# Altium PCB dalang-v1.3_20211125.PcbDoc (part 4 of 5)
Units mil, origin at the board's own origin, x right, y up, seen from the top; angles counter-clockwise.
Board outline 4000 x 3999.92 mil, 4 copper layers (Top, gnd, vcc, Bottom), stack 35.4 mil thick; 365 components, 335 nets, 1640 pads, 1414 vias.
Unrouted connection lines stored in the file: 894.
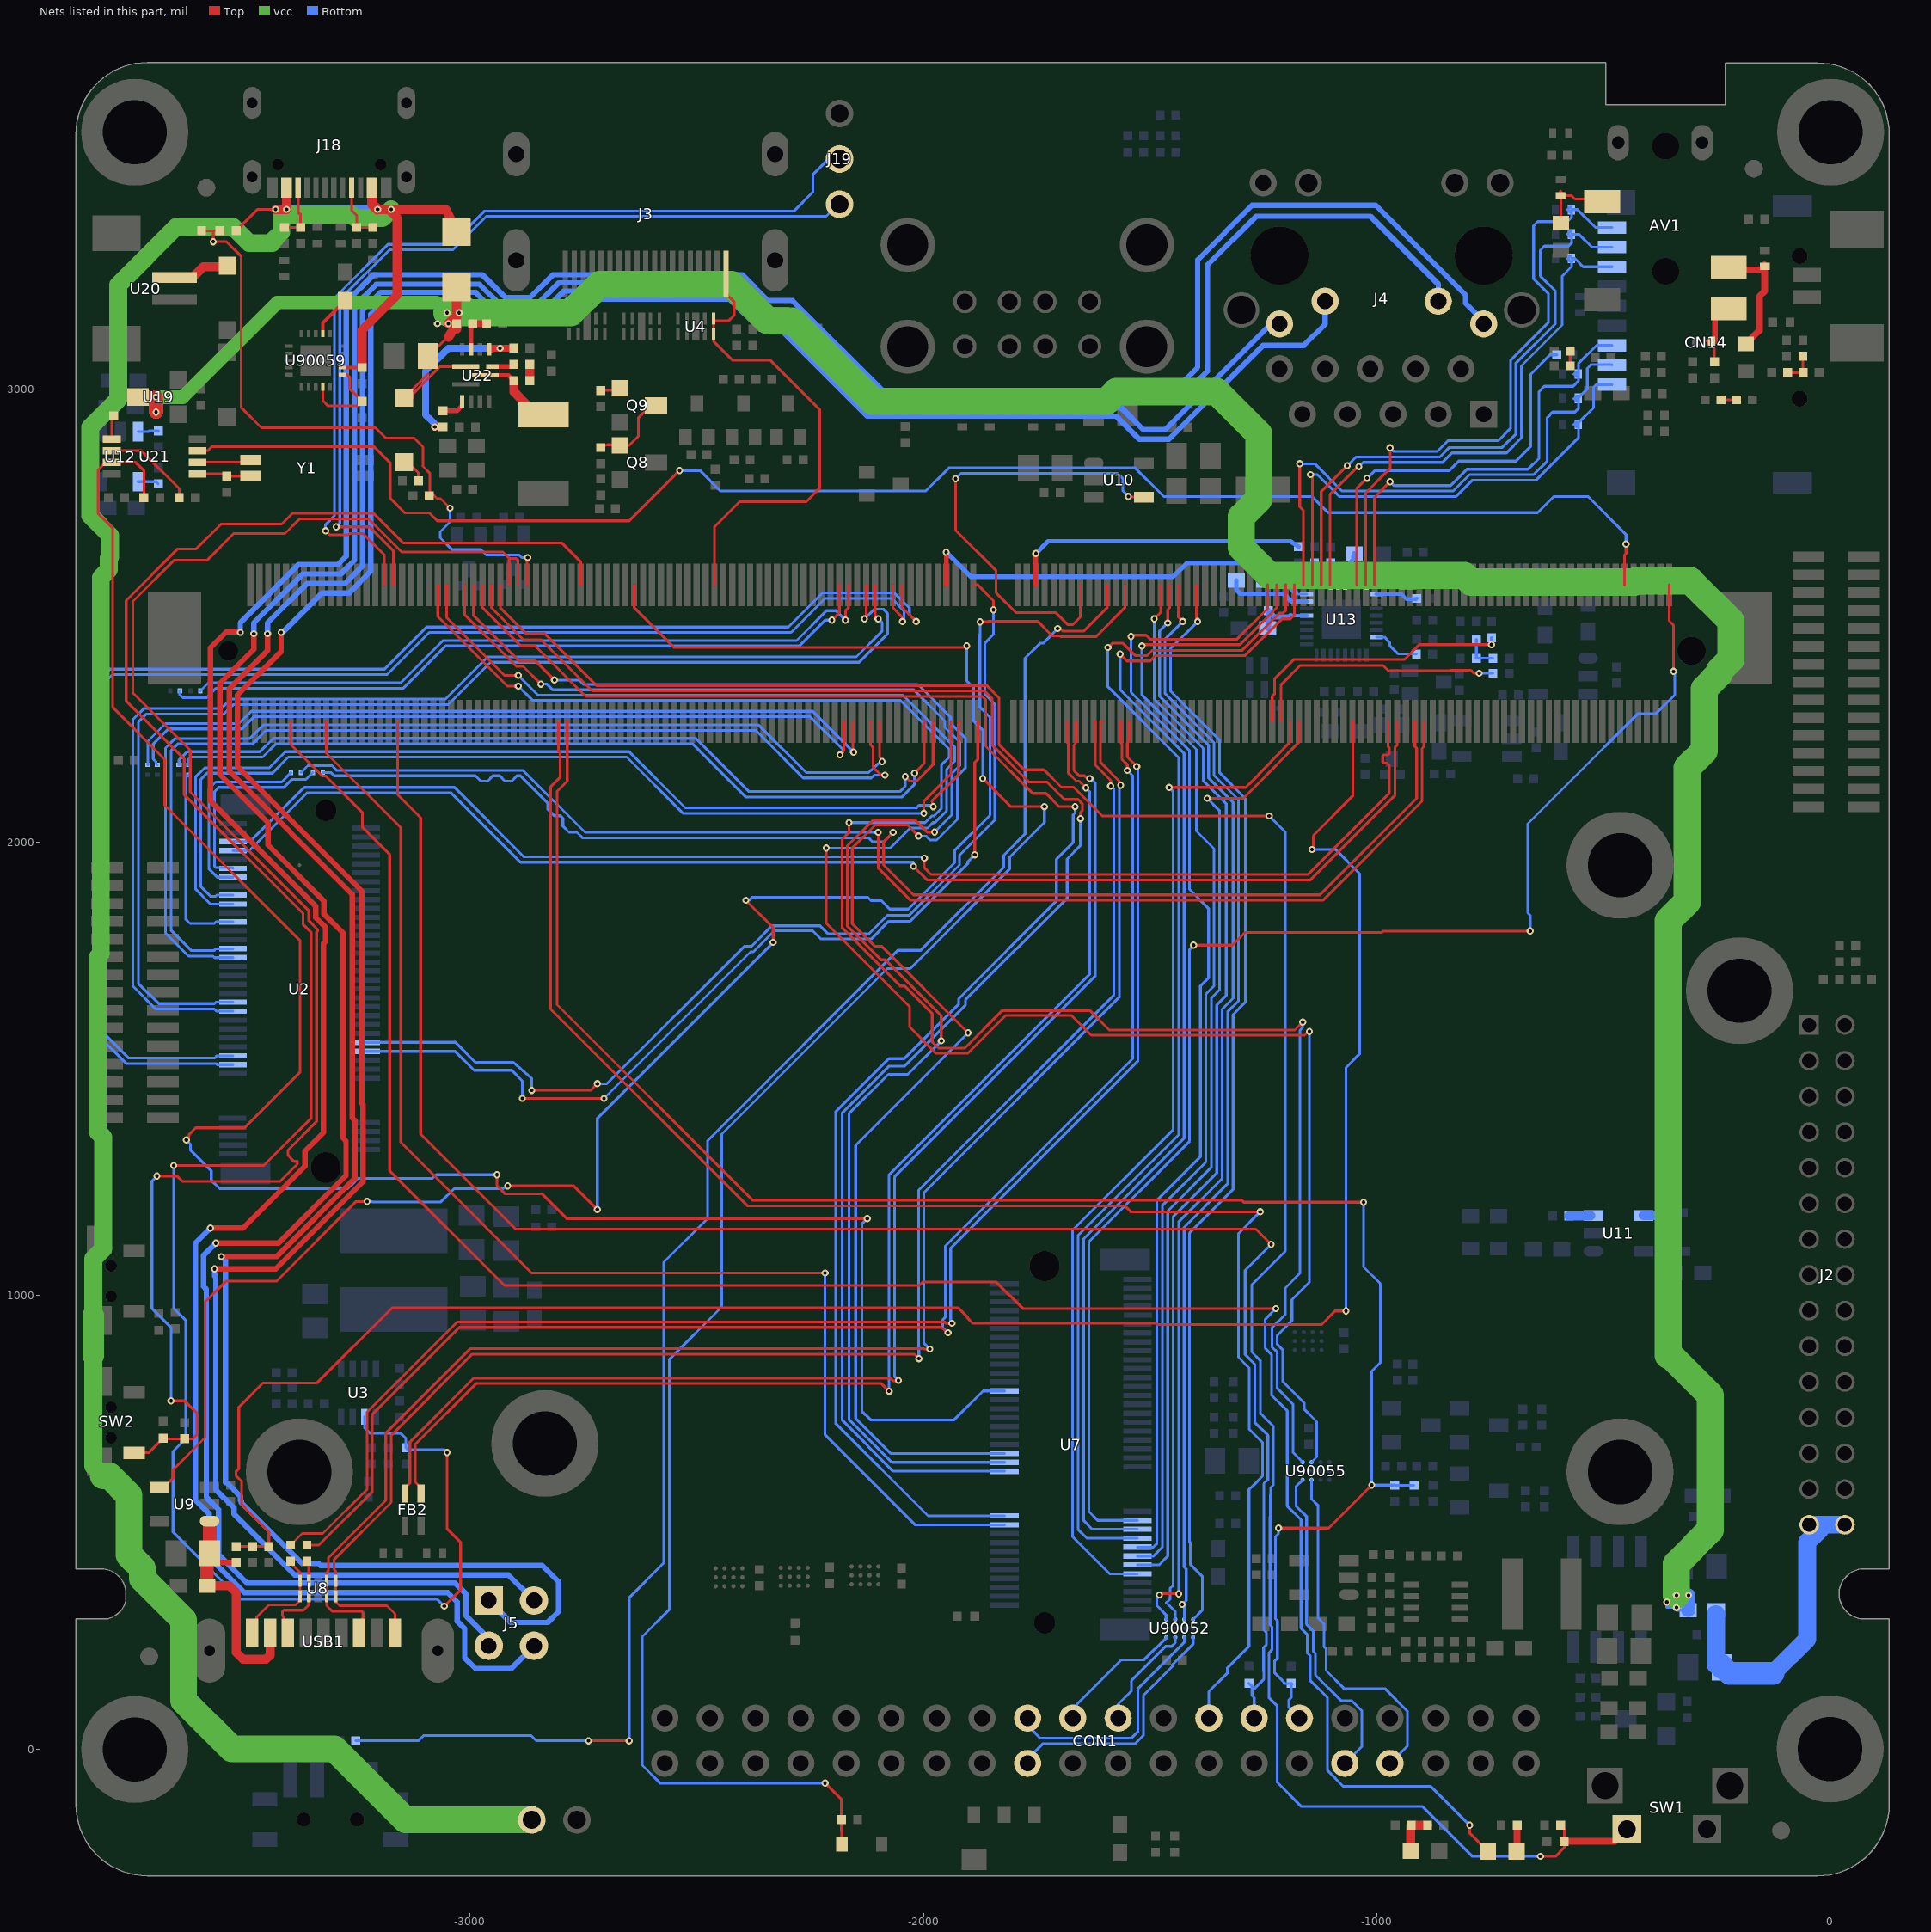
[diagram p5: the nets of this part, all layers, seen from the top]

## Via types
v1: diameter 15.75, hole 7.87, Top to Bottom, 1414 vias

## Nets (pads, with @x,y where several pads share a name; then routed paths per layer and width w, separated by ;. In a path a pad name is that pad's centre, name@x,y a point inside that pad or via, vN(x,y) a via of type N, cw(c..) or ccw(c..) an arc to the next point about the centre after c; other vN are vias at no path point) (continued)
N16561736: C15.2 U2.23 | length 430.8
  Bottom w6: C15.2@-3621,2149.17 -3627,2143.17 -3627,1830 -3618,1821 -3564.41,1821 -3561,1824.41 U2.23@-3523.03,1824.41
N16561860: C14.2 U2.13 | length 433.6
  Bottom w6: U2.13@-3523.03,1922.83 -3557.83,1922.83 -3576,1941 -3576,2118 -3561,2133 -3415.83,2133 C14.2@-3394.83,2154
N16561864: C13.2 U2.11 | length 442.4
  Bottom w6: U2.11@-3523.03,1942.52 -3524.55,1944 -3561,1944 -3564,1947 -3564,2112 -3555,2121 -3411,2121 -3393,2139 -3361.83,2139 C13.2@-3346.83,2154
N16594921: C110.1 R105.2 U22.9 | length 412.9
  Top w10: U22.9@-2958.47,3087.09 -2952,3087.09 -2934,3087.09 v1(-2934,3090)
  Top w15: v1(-3078,2916) -3077.72,2916.28 R105.2@-3060,2916.28 ; -2952,3087.09 -2949.09,3090 v1(-2934,3090) C110.1@-2903.72,3090
  Bottom w15: v1(-3078,2916) -3078,2923.02 -3090.28,2935.31 -3091.02,2935.31 -3098.63,2942.91 -3098.63,3039.37 -3048,3090 v1(-2934,3090)
N16595107: C103.2 L3.1 U22.7 | length 185.8
  Top w10: U22.7@-2966.35,3030 -2915.72,3030 C103.2@-2903.72,3018
  Top w20: C103.2@-2903.72,3018 -2903.72,2994 -2874,2964.28 -2874,2952 -2847.39,2952 L3.1@-2838,2942.61
N16595147: R103.1 R104.2 U22.11 | length 88
  Top w10: U22.11@-2997.84,3087.09 -2997.84,3132 R103.1@-2994.28,3144
  Top w15: R103.1@-2994.28,3144 R104.2@-2963.72,3144
N16595155: R101.1 U22.8 | length 48.7
  Top w10: U22.8@-2950.6,3049.68 -2908.03,3049.68 R101.1@-2903.72,3054
N16595159: C103.1 R101.2 | length 36
  Top w20: C103.1@-2868.28,3018 R101.2@-2868.28,3054
N16595281: R105.1 U22.3 | length 56.9
  Top w10: R105.1@-3060,2951.72 -3029.06,2951.72 -3017.53,2963.24 U22.3@-3017.53,2972.91
N16597149: Q8.1 Q9.3 R94.1 | length 184.2
  Top w6: R94.1@-2712,2870.72 -2696.72,2877 -2671.5,2877 Q8.1@-2670,2875.5 -2649,2875.5 -2629,2895.5 -2629,2936 -2601,2964 Q9.3@-2590,2964
N16597580: Q9.1 R96.1 | length 45
  Top w6: R96.1@-2712,2996.72 -2673,2996.72 -2673,2998.5 Q9.1@-2670,3001.5
N16616965: R64.2 U12.3 | length 45.7
  Bottom w5.91: U12.3@-3732.7,2905.61 -3710.11,2905.61 -3708.37,2907.35 R64.2@-3687.75,2907.35
N16617009: C59.1 U12.4 | length 46.8
  Bottom w5.91: U12.4@-3732.7,2795.37 -3693.01,2795.37 C59.1@-3687.99,2790.35
N16618223: R63.2 U11.3 | length 54.6
  Bottom w6: U11.3@-528.37,1176.37 -528,1176.74 U11.3@-522,1176.74
  Bottom w20: R63.2@-576.28,1176 -528.74,1176 U11.3@-528.37,1176.37
N16618267: C58.1 U11.4 | length 54.2
  Bottom w20: U11.4@-411.76,1176.74 -364.98,1176.74 C58.1@-359.72,1182
N16622807: LED1.1 R89.2 | length 58.8
  Top w15: LED1.1@-691.34,-226.38 -690.28,-225.32 R89.2@-690.28,-168
N16650602: R3.2 | length 663.8
  Top w10: -1752.36,2567.72 -1752.36,2636.64 v1(-1752,2637)
  Bottom w10: v1(-1752,2637) -1725,2664 -1189.67,2664 -1187.16,2661.63 R3.2@-1172.72,2652
N16650610: R4.2 | length 784.9
  Top w10: v1(-1950,2640) -1949.21,2639.21 -1949.21,2567.72
  Bottom w5.91: R4.2@-1275.59,2616 R4.2@-1275.59,2619.09
  Bottom w10: v1(-1950,2640) -1896,2586 -1449,2586 -1419,2616 R4.2@-1275.59,2616
N16650818: R2.1 | length 621.5
  Top w6: -1230.71,2266.54 -1230.71,2322 -1225.17,2327.54 -1225.17,2361.29 -1183.46,2403 -938.91,2403 -905.91,2436 v1(-747,2436)
  Bottom w6: v1(-747,2436) R2.1@-747,2451.28
N16650826: R1.1 | length 573.9
  Top w6: -1211.02,2266.54 -1211.02,2348.16 -1169.29,2389.89 -986.2,2389.89 -975.12,2378.81 -836.98,2378.81 -836.11,2379.68 -792.74,2379.68 -786.05,2373 v1(-774,2373)
  Bottom w6: v1(-774,2373) R1.1@-743.72,2373
N16667736: C98.2 U21.1 Y1.1 | length 119.8
  Top w6: U21.1@-3601.52,2812.71 -3543,2812.71 -3538.01,2807.72 C98.2@-3537,2807.72 -3484,2807.72 Y1.1@-3483.83,2807.89
N16667764: U21.2 Y1.2 | length 119.8
  Top w6: U21.2@-3601.52,2838.3 -3488.85,2838.3 Y1.2@-3483.83,2843.32
N16667930: D5.1 U20.2 | length 128
  Top w5.91: D5.1@-3540.35,3269.68 -3538.17,3271.87 D5.1@-3535,3271.87
  Top w20: U20.2@-3652.36,3246.26 -3612,3246.26 -3588.58,3269.68 D5.1@-3540.35,3269.68
N16667996: R99.1 U21.6 | length 203.5
  Top w6: U21.6@-3790.5,2863.89 -3725.72,2863.89 -3641.72,2779.89 R99.1@-3641.72,2760
N16668000: R100.1 U21.5 | length 52.7
  Top w6: U21.5@-3790.5,2889.48 -3790.5,2935.78 R100.1@-3786,2940.28
N16668432: LED2.1 R91.2 R92.2 | length 94
  Top w20: LED2.1@-924.8,-225.2 -924.8,-168.52 R91.2@-924.28,-168 R92.2@-887.72,-168
N16672966: C78.1 R74.2 R75.1 | length 70
  Top w6: R74.2@-93.28,3036 C78.1@-59.72,3036 -59.72,3072 R75.1@-60,3072.28
N16674381: C40.2 R48.2 | length 33.6
  Top w6: R48.2@-240.28,2976 C40.2@-206.72,2976
N16674391: AV1.6 ED5.1 R43.1 | length 156.9
  Top w6: R43.1@-594,3366 ED5.1@-594,3426.28 -588.5,3426.28 -587,3426.28 -569.98,3426.28 -562.7,3419 -508.37,3419 AV1.6@-502.76,3413.39
N16674395: C41.2 R49.2 | length 33
  Top w6: R49.2@-573.28,3051 C41.2@-573.28,3084
N16674471: AV1.3 ED6.1 R45.1 | length 269.9
  Top w5.91: ED6.1@-144,3263 ED6.1@-144,3270.28
  Top w15: AV1.3@-223.23,3267.72 -214.72,3267.72 -210,3263 -144,3263 -144,3216 -156,3204 -156,3129 R45.1@-186,3099
N16674495: AV1.4 ED7.1 R46.1 | length 155.9
  Top w5.91: ED7.1@-261.28,3105 ED7.1@-254,3105
  Top w6: R46.1@-255,3059.72 -255,3104 ED7.1@-254,3105
  Top w12: ED7.1@-254,3105 -254,3177.17 AV1.4@-223.23,3177.17
N16842197: R90549.2 U90059.1 U90059.19 | length 207.9
  Top w5.91: U90059.19@-3324.8,3003.94 -3324.8,2974.41 -3312.99,2962.6 -3248.03,2962.6 R90549.2@-3238.19,2972.44 -3265.75,3000 -3265.75,3025.59 -3271.65,3031.5 U90059.1@-3281.5,3031.5
N16842337: C90286.1 U90059.7 | length 93.2
  Top w7.87: U90059.7@-3324.8,3122.05 -3324.8,3145.67 C90286.1@-3275.59,3194.88
N16842548: J18.A5 R109.1 R90551.2 | length 128
  Top w5.91: J18.A5@-3261.42,3444.09 -3261.42,3393.7 -3250,3382.28 R90551.2@-3250,3356.3 R109.1@-3214.57,3356.3
N16842549: J18.B5 R108.1 R90552.2 | length 125.5
  Top w5.91: R108.1@-3409.45,3356.3 R90552.2@-3374.02,3356.3 -3374.02,3384.25 -3379.53,3389.76 J18.B5@-3379.53,3444.09
N16854878: D3.2 R90557.1 | length 64.6
  Top w5.91: D3.2@-3145.67,2838.58 -3147.64,2840.55 -3139.76,2840.55 -3114.17,2814.96 R90557.1@-3114.17,2797.24
N64903279: C62.1 R69.2 R70.1 | length 78.6
  Bottom w6: R69.2@-780.28,2448 C62.1@-780.28,2406 R70.1@-743.72,2406
N64910867: C66.1 U13.21 | length 73
  Bottom w5.91: -1070.28,2604.72 -1069.88,2604.33 U13.21@-1069.88,2571.85
  Bottom w10: -1070.28,2604.72 -1051.5,2623.5 -1051.5,2628 C66.1@-1050.2,2636.81
N64910878: R65.2 U13.31 | length 108
  Bottom w5.91: U13.31@-1000.98,2452.76 -983.24,2452.76 -971.46,2440.97 -971.46,2434.31 -952.5,2415.35 R65.2@-912.4,2415.35
N64910882: C73.1 C74.1 U13.13 | length 131.3
  Bottom w7.87: -1189.96,2500 U13.13@-1154.53,2500
  Bottom w11.81: C74.1@-1239.28,2511 -1225.27,2496.98 -1192.98,2496.98 -1189.96,2500
  Bottom w12: C73.1@-1240.5,2472 -1239.28,2473.22 C74.1@-1239.28,2511
N64910922: C71.1 U13.15 | length 186.8
  Bottom w9.84: C71.1@-1310.04,2577.76 -1310.04,2557.09 -1301.18,2548.23 -1205.25,2548.23 -1188.52,2531.5 U13.15@-1154.53,2531.5
N64910926: C71.2 U13.16 | length 105.2
  Bottom w5.91: -1179.13,2551.18 -1175.2,2547.24 U13.16@-1154.53,2547.24
  Bottom w11.81: C71.2@-1247.05,2577.76 -1205.71,2577.76 -1179.13,2551.18
N64910964: C64.1 U13.25 | length 94.4
  Bottom w7.87: U13.25@-1000.98,2547.24 -944.88,2547.24 -934.06,2536.42 -913.3,2536.42 C64.1@-911.72,2538
N64911028: C65.1 U13.24 | length 91.9
  Bottom w5.91: U13.24@-1022.64,2571.85 -1012.8,2571.85 ; -950.79,2571.85 -934.44,2571.85 C65.1@-933.6,2572.69
  Bottom w10: C65.1@-933.6,2572.69 C65.1@-931.5,2574
  Bottom w11.81: -1012.8,2571.85 -950.79,2571.85
N166477941: R72.2 U13.19 | length 63.1
  Bottom w5.91: R72.2@-1137.28,2616 -1136.91,2616 -1116.57,2595.66 -1110.05,2595.66 -1101.38,2586.99 U13.19@-1101.38,2571.85
N166482021: R71.2 U13.20 | length 51.4
  Bottom w5.91: R71.2@-1101.38,2616.14 -1100.39,2616.14 -1085.63,2601.38 U13.20@-1085.63,2571.85
NPU_UART2_RX: J19.2 | length 2006.1
  Top w5.91: v1(-3318.9,2687.01) -3310.04,2678.15 -3268.7,2678.15 -3265.75,2681.1 -3236.22,2681.1 -3189.37,2634.25 -3189.37,2567.72
  Bottom w5.91: v1(-3318.9,2687.01) -3318.9,2700.79 -3299.21,2720.47 -3299.21,3200.94 -3181.26,3318.9 -3041.76,3318.9 -2967.95,3392.72 -2285.43,3392.72 -2244.09,3434.06 -2244.09,3472.44 -2209.06,3507.48 J19.2@-2185.04,3507.48
NPU_UART2_TX: J19.1 | length 1921.9
  Top w5.91: v1(-3295.28,2695.87) -3222.18,2695.87 -3169.69,2643.37 -3169.69,2567.72
  Bottom w5.91: v1(-3295.28,2695.87) -3287.4,2703.74 -3287.4,3197.33 -3177.65,3307.09 -3038.15,3307.09 -2964.33,3380.91 -2214.53,3380.91 -2184.79,3410.65 J19.1@-2185.04,3407.48
PCIE_CLKREQNB: U2.52 | length 1945.3
  Top w5.91: v1(-2884.84,1435.04) v1(-2704.72,1435.04)
  Top w6: v1(-1886.81,1972.44) -1886.81,2176.18 -1880.32,2182.68 -1880.32,2266.54
  Bottom w5.91: v1(-2704.72,1435.04) -2381.23,1758.53 -2375.24,1758.53 -2328.97,1804.8 -2244.05,1804.8 -2225.92,1786.68 -2115.5,1786.68 -2076.27,1825.9 -2029.18,1825.9 -1902.01,1953.08 -1902.01,1957.25 v1(-1886.81,1972.44)
  Bottom w6: U2.52@-3229.72,1538.98 -3033.02,1538.98 -2991.09,1497.05 -2908.46,1497.05 -2884.84,1473.43 v1(-2884.84,1435.04)
PCIE_PERST#_3.3V: U2.50 | length 2279.5
  Top w5.91: v1(-2864.17,1452.76) -2734.25,1452.76 v1(-2719.49,1467.52)
  Top w6: -1890.16,2567.72 -1880.27,2567.72 -1845.47,2532.92 v1(-1845.47,2512.8)
  Bottom w6: U2.50@-3229.72,1558.66 -3032.48,1558.66 -2988.58,1514.76 -2905.51,1514.76 -2864.17,1479.33 v1(-2864.17,1452.76) ; v1(-2719.49,1467.52) -2698.17,1467.52 -2395.13,1770.57 -2379.46,1770.57 -2334.27,1815.76 -2228.3,1815.76 -2210.18,1797.63 -2120.53,1797.63 -2078.91,1839.25 -2031.32,1839.25 -1920.5,1950.08 -1920.5,1971.24 -1842.13,2049.61 -1842.13,2304.39 -1864.3,2326.56 -1864.3,2439.91 -1845.47,2458.73 v1(-1845.47,2512.8)
PCIE_PWR: R21.2 U3.6 | length 4940.2
  Top w5.91: v1(-3654,1287) -3455.13,1287 -3404.53,1337.6
  Top w6: -3404.53,1337.6 -3351.09,1391.03 -3351.09,1801.6 -3368.28,1818.79 -3368.28,1842.84 -3630.75,2105.31 -3630.75,2183.9 -3758.86,2312.01 -3758.86,2533.27 -3644.98,2647.15 -3604.44,2647.15 -3549.53,2702.05 -3415.74,2702.05 -3392.3,2725.49 -3212.35,2725.49 -3146.83,2659.97 -2796.97,2659.97 -2756.3,2619.3 -2756.3,2567.72 ; v1(-3057,315) -3021,351 -3021,456 -3051,486 v1(-3051,654)
  Bottom w5.91: U3.6@-3233.2,732.85 -3233.2,708.66 -3221.39,696.85 -3153.54,696.85 -3141.73,685.04 -3141.73,676.18 R21.2@-3141.73,664.64 ; R21.2@-3141.73,664.37 R21.2@-3141.73,664.64 ; -3121.06,659.72 -3136.81,659.72 R21.2@-3141.73,664.64
  Bottom w6: v1(-3654,1287) -3654,972 -3627,945 -3627,685.04 -3655.51,656.53 -3655.51,478.51 -3507,330 -3072,330 v1(-3057,315) ; -3121.06,659.72 -3056.72,659.72 v1(-3051,654)
PCIE_REF_CLKN: U2.53 | length 3049.5
  Top w6: -2067.32,2567.72 -2067.32,2517.15 -2046,2495.83 v1(-2046,2487)
  Bottom w6: U2.53@-3523.03,1529.13 -3558.87,1529.13 -3564,1524 -3753,1524 -3807,1578 -3807,2352 -3789,2370 -3183,2370 -3090,2463 -2292,2463 -2217,2538 -2070,2538 -2043,2511 -2043,2490 v1(-2046,2487)
PCIE_REF_CLKP: U2.55 | length 3119.1
  Top w6: -2047.64,2567.72 -2047.64,2518.64 v1(-2016,2487)
  Bottom w6: U2.55@-3523.03,1509.45 -3558,1509.45 -3560.55,1512 -3759,1512 -3819,1572 -3819,2358 -3795,2382 -3189,2382 -3096,2475 -2298,2475 -2223,2550 -2064,2550 -2031,2517 -2031,2502 v1(-2016,2487)
PCIE_RX0N: U2.41 | length 2723.4
  Top w6: v1(-2130,2493) -2130,2495.38 -2126.38,2499 -2126.38,2567.72
  Bottom w6: U2.41@-3523.03,1647.24 -3561,1647.24 -3564.24,1644 -3687,1644 -3732,1689 -3732,2265 -3714,2283 -3543,2283 -3522,2304 -3048,2304 -2955,2397 -2142,2397 -2079,2460 -2079,2505 -2088,2514 -2109,2514 v1(-2130,2493)
PCIE_RX0P: U2.43 | length 2676.1
  Top w6: -2106.69,2567.72 -2106.69,2496 -2103,2496 v1(-2100,2493)
  Bottom w6: U2.43@-3523.03,1627.56 -3559.56,1627.56 -3564,1632 -3693,1632 -3744,1683 -3744,2271 -3720,2295 -3549,2295 -3528,2316 -3054,2316 -2961,2409 -2148,2409 -2091,2466 -2091,2484 v1(-2100,2493)
PCIE_RX1N: U2.29 | length 2329.5
  Top w6: -2116.54,2266.54 -2116.54,2214.49 -2111.27,2209.22 -2111.27,2166 -2094,2148.73 -2085.73,2148.73 v1(-2085,2148)
  Bottom w6: U2.29@-3523.03,1765.35 -3561,1765.35 -3565.35,1761 -3615,1761 -3660,1806 -3660,2202 -3645,2217 -3480,2217 -3450,2247 -2370,2247 -2265,2142 -2115,2142 -2109,2148 v1(-2085,2148)
PCIE_RX1P: U2.31 | length 2329.6
  Top w6: -2096.85,2266.54 -2096.85,2187 -2091,2181.15 v1(-2091,2178)
  Bottom w6: U2.31@-3523.03,1745.67 -3564,1745.67 -3567.33,1749 -3621,1749 -3672,1800 -3672,2208 -3651,2229 -3486,2229 -3456,2259 -2364,2259 -2259,2154 -2120.45,2154 -2092.49,2179.63 -2091,2181 v1(-2091,2178)
PCIE_RX2N: U2.17 | length 2211.6
  Top w6: v1(-1999.02,2063.98) -1999.02,2090.55 -1939.37,2150.2 -1939.37,2266.54
  Bottom w6: U2.17@-3523.03,1883.46 -3558.54,1883.46 -3561,1881 -3573,1881 -3594,1902 -3594,2139 -3580.44,2152.56 -3436.44,2152.56 -3401.01,2187.99 -2654.53,2187.99 -2530.54,2064 -2025.59,2064 v1(-1999.02,2063.98)
PCIE_RX2P: U2.19 | length 2262.9
  Top w6: v1(-1978.35,2078.74) -1981.3,2090.55 -1923,2148.85 -1923,2263.22 -1919.69,2266.54
  Bottom w6: U2.19@-3523.03,1863.78 -3572.62,1863.78 -3605.91,1897.07 -3605.91,2143.93 -3585.47,2164.37 -3442.91,2164.37 -3407.48,2199.8 -2649.21,2199.8 -2525.5,2076.09 -2014.71,2076.09 -2008.8,2082 -1981.61,2082 v1(-1978.35,2078.74)
PCIE_RX3N: U2.5 | length 2946.8
  Top w6: v1(-1998,1965) -1998,1944 -1983,1929 -1152,1929 -972,2109 -972,2169 -978,2175 -984,2175 -987,2178 -987,2190 -984,2193 -975,2193 -972,2196 -972,2208 -974.8,2210.8 -974.8,2266.54
  Bottom w6: U2.5@-3523.03,2001.57 -3485.43,2001.57 -3366,2121 -3034.5,2121 -2881.5,1968 -2001,1968 v1(-1998,1965)
PCIE_RX3P: U2.7 | length 2943.1
  Top w6: v1(-2022,1947) -1992,1917 -1146,1917 -960,2103 -960,2209.12 -955.12,2214 -955.12,2266.54
  Bottom w6: U2.7@-3523.03,1981.89 -3487.11,1981.89 -3360,2109 -3042,2109 -2889,1956 -2022,1956 v1(-2022,1947)
PCIE_TX0N: C19.1 | length 1605.1
  Top w6: v1(-2202,2490) -2185.43,2506.57 -2185.43,2567.72
  Bottom w6: C19.1@-3640.17,2334 -3640.17,2325 -3634.17,2319 -3581.37,2319 -3560.37,2340 -3147,2340 -3054,2433 -2274,2433 -2217,2490 v1(-2202,2490)
PCIE_TX0P: C20.1 | length 1585.5
  Top w6: v1(-2172,2490) -2172,2510.75 -2165.75,2517 -2165.75,2567.72
  Bottom w6: C20.1@-3595.17,2334 -3577.17,2352 -3153,2352 -3060,2445 -2280,2445 -2214,2511 -2193,2511 v1(-2172,2490)
PCIE_TX1N: C17.1 | length 1717.1
  Top w6: v1(-2184,2193) -2175.59,2201.41 -2175.59,2266.54
  Bottom w6: C17.1@-3690,2170.83 -3693,2173.83 -3693,2178 -3699,2184 -3699,2217 -3666,2250 -3504,2250 -3477,2277 -2250,2277 -2178,2205 -2178,2199 v1(-2184,2193)
PCIE_TX1P: C18.1 | length 1742.1
  Top w6: -2155.91,2266.54 -2155.91,2202 -2154,2200.09 v1(-2154,2199)
  Bottom w6: C18.1@-3711,2170.83 -3711,2223 -3672,2262 -3510,2262 -3483,2289 -2244,2289 v1(-2154,2199)
PCIE_TX2N: C15.1 | length 1838.4
  Top w6: v1(-2019.69,2152.56) -1998.43,2173.82 -1998.43,2266.54
  Bottom w6: C15.1@-3621,2170.83 -3623.03,2170.83 -3622.38,2171.78 -3621.91,2172.46 -3621.91,2182.09 -3616.01,2187.99 -3457.68,2187.99 -3428.15,2217.52 -2510.02,2217.52 -2392.59,2100.09 -2047.07,2100.09 -2019.69,2127.48 v1(-2019.69,2152.56)
PCIE_TX2P: C16.1 | length 1883.3
  Top w6: v1(-2040,2145) -2029.84,2134.84 -2014.95,2134.84 -1978.74,2171.05 -1978.74,2266.54
  Bottom w6: C16.1@-3642,2170.83 -3642,2182.09 -3624.28,2199.8 -3463.58,2199.8 -3434.06,2229.33 -2502.33,2229.33 -2385,2112 -2052,2112 -2040,2124 v1(-2040,2145)
PCIE_TX3N: C13.1 | length 2910.9
  Top w6: v1(-2067,2022) -2088,2001 -2088,1950 -2022,1884 -1125,1884 -912,2097 -912,2207.25 -915.75,2211 -915.75,2266.54
  Bottom w6: C13.1@-3325.17,2154 -3307.35,2154 -3300,2146.65 -2988.19,2146.65 -2976.38,2134.84 -2961.61,2134.84 -2949.8,2146.65 -2935.04,2146.65 -2923.23,2134.84 -2908.46,2134.84 -2896.65,2146.65 -2889,2146.65 -2829.12,2086.78 -2829.12,2073.66 -2813.98,2058.51 -2800.85,2058.51 -2795.39,2053.04 -2795.39,2035.93 -2781.5,2022.04 -2764.38,2022.04 -2752.35,2010 -2121,2010 -2112,2001 -2088,2001 v1(-2067,2022)
PCIE_TX3P: C14.1 | length 2916
  Top w6: v1(-2100,2022) -2100,1944 -2028,1872 -1119,1872 -900,2091 -900,2207.06 -896.06,2211 -896.06,2266.54
  Bottom w6: C14.1@-3373.17,2154 -3358.17,2169 -3304.54,2169 -3294,2158.46 -2883,2158.46 -2746.54,2022 v1(-2100,2022)
PORT_HPD: J3.19 U4.5 U4.6 | length 1068.7
  Top w6: -2461.02,2567.72 -2461.02,2695.98 -2406,2751 -2259,2751 -2229,2781 -2229,2955 -2337,3063 -2421,3063 -2462.63,3104.63 U4.5@-2462.63,3120.78 U4.6@-2462.63,3155.22 -2461.85,3150 -2430,3150 -2418,3162 -2418,3192.49 -2435.51,3210 J3.19@-2435.51,3253.6
PWM0: CON1.11 ED26.1 R16.1 R19.1 | length 4043.7
  Top w6: -2785.83,2266.54 -2785.83,2134.84 -2808.07,2112.6 -2808.07,1641.73 -2376.97,1210.63 -1298.04,1210.63 -1293.41,1206 v1(-1029,1206) ; v1(-1216.54,487.2) -1105.8,487.2 v1(-1011,582)
  Bottom w5.91: -1223.55,460.5 -1223.55,468.4 -1216.54,475.42 v1(-1216.54,487.2) ; -1204.72,144.68 -1188.84,144.68 ED26.1@-1188.7,144.55 ; ED26.1@-1187.01,142.85 ED26.1@-1188.7,144.55 ; CON1.11@-1170.47,68.11 -1193.77,91.41 -1193.77,108.31 -1188.7,113.38 ED26.1@-1188.7,144.55
  Bottom w6: -1223.55,460.5 -1223.55,287.15 -1219.3,282.9 -1219.3,199.87 -1225.62,193.55 -1225.62,168.31 -1204.72,147.41 -1204.72,144.68 ; v1(-1029,1206) -1029,1063.33 -992.13,1026.45 -992.13,852.02 -1011,833.14 v1(-1011,582) -960.28,582 R16.1@-960,581.72 R19.1@-918,581.72
PWM1: CON1.13 ED27.1 | length 4038.9
  Top w6: -3159.84,2266.54 -3159.84,2105.16 -3109.06,2054.38 -3109.06,1356.29 -2899.61,1146.85 -1266.85,1146.85 v1(-1233,1113)
  Bottom w5.91: ED27.1@-1282.14,144.8 ED27.1@-1275.25,137.91 ; CON1.13@-1270.47,68.11 -1270.47,112.99 -1275.25,117.77 ED27.1@-1275.25,137.91 ; -1249.43,171.26 -1249.43,153.65 -1270.21,132.87 ED27.1@-1275.25,137.91
  Bottom w6: -1249.43,171.26 -1249.43,224.12 -1243.11,230.44 -1243.11,256.56 -1249.02,262.47 -1249.02,585.5 -1240.06,594.46 -1240.06,691.8 -1269.1,720.85 -1269.1,849.05 -1290.35,870.3 -1290.35,1055.65 v1(-1233,1113)
PWM3: D2.1 R81.1 | length 4370.9
  Top w6: -2638.19,2567.72 -2638.19,2517.47 -2550.79,2430.07 -1907.53,2430.07 v1(-1904.53,2433.07) ; v1(-2217,-75) -2181,-111 -2181,-155.72 R81.1@-2180.72,-156 D2.1@-2179.9,-210 ; v1(-1869.09,2140.75) -1807.09,2078.74 v1(-1733.27,2078.74)
  Bottom w5.91: v1(-1904.53,2433.07) -1904.53,2356.47 -1889.76,2341.71 -1889.76,2268.15 -1869.09,2247.48 v1(-1869.09,2140.75)
  Bottom w6: v1(-2217,-75) -2581.1,-75 -2620.28,-35.82 -2620.28,247.86 -2560.04,308.1 -2560.04,859.96 -2444.88,975.12 -2444.88,1356.27 -2079.7,1721.46 -2029.36,1721.46 -1810.04,1940.78 -1810.04,1967.14 -1733.27,2043.91 v1(-1733.27,2078.74)
PWRON: C1.1 ED1.1 SW1.2 | length 5119.2
  Top w6: -2933.46,2567.72 -2933.46,2517.47 -2876.69,2460.7 -2836,2460.7 -2721.02,2345.71 -1860.37,2345.71 -1833.52,2318.86 -1833.52,2216.2 -1777.49,2160.17 -1734.38,2160.17 -1695.81,2121.6 -1668.79,2121.6 -1605.26,2058.07 v1(-1237.2,2058.07) ; v1(-639,-237) -605.86,-237 -586.36,-217.5 ED1.1@-586.36,-204 -586.36,-175.92 C1.1@-594.28,-168
  Top w15: ED1.1@-586.36,-204 -475.26,-204 SW1.2@-448.43,-177.17
  Bottom w5.91: v1(-1237.2,2058.07) -1201.77,2022.64 -1201.77,1098.09 -1275.59,1024.27 -1275.59,875.63 -1256.9,856.94 -1256.9,740.79 -1228.2,712.08 -1228.2,581.84 -1234.25,575.79 -1234.25,561.02
  Bottom w6: -1234.25,561.02 -1234.25,513.78 -1235.46,512.57 -1235.46,273.75 -1231.2,269.49 -1231.2,218.5 -1237.52,212.19 -1237.52,112.52 -1219.49,94.49 -1219.49,-73.82 -1166.34,-126.97 -899.03,-126.97 -789,-237 v1(-639,-237)
RESET_L: C2.1 ED2.1 SW2.1 | length 3646.4
  Top w5.91: v1(-3690.94,1263.78) -3646.65,1263.78 -3634.84,1251.97 -3419.24,1251.97 -3380.91,1290.31 -3380.91,1296.26 ; ED2.1@-3678,684.28 ED2.1@-3677.17,685.09
  Top w6: SW2.1@-3741.14,653.04 -3740.18,654 -3708.28,654 -3678,684.28 -3612,684.28 -3603,693.28 -3603,741 -3630,768 v1(-3660,768) ; -3380.91,1296.26 -3388.59,1296.26 -3401.57,1309.24 -3401.57,1321.21 -3338.71,1384.08 -3338.71,1802.04 -3336.61,1804.13 -3336.61,1807.82 -3355.65,1826.85 -3355.65,1849.31 -3617.57,2111.22 -3617.57,2203.2 -3744.09,2329.72 -3744.09,2531.2 -3653.24,2622.05 -3580.85,2622.05 -3521.8,2681.1 -3408.37,2681.1 -3375.89,2713.58 -3224.41,2713.58 -3151.11,2640.28 -2927.56,2640.28 -2913.78,2626.5 -2913.78,2625.91 ; -2913.78,2567.72 -2913.78,2625.91 ; -2894.09,2567.72 -2894.09,2622 -2898,2625.91 -2913.78,2625.91
  Bottom w6: v1(-3690.94,1263.78) -3702,1252.72 -3702,972 -3660,930 v1(-3660,768)
RTC_CLKO_WIFI: R97.1 U7.50 U21.7 | length 4419
  Top w5.91: v1(-3625.98,1343.5) -3627.19,1344.71 -3619.53,1352.36 -3619.53,1356.19 -3605.65,1370.08 -3593.5,1370.08
  Top w6: R97.1@-3719.72,2760 -3719.72,2820 -3738.02,2838.3 U21.7@-3790.5,2838.3 -3790.5,2839.04 -3803.05,2839.04 -3820.87,2821.22 -3820.87,2725.53 -3788.39,2693.05 -3788.39,2297.24 -3673.85,2182.7 -3673.85,2081.69 -3374.91,1782.75 -3374.91,1493.29 -3498.12,1370.08 -3593.5,1370.08 ; v1(-2940.94,1266.73) -2940.94,1243.3 -2922.06,1224.41 -2841.04,1224.41 -2786.63,1170 v1(-2124,1170)
  Bottom w5.91: v1(-3625.98,1343.5) -3617.13,1334.65 -3617.13,1331.69 ; -3258.31,1248.03 -3247.55,1258.8 -3082.78,1258.8 -3082.78,1259.73 -3078.74,1263.78 -3077.8,1263.78 -3074.85,1266.73 v1(-2940.94,1266.73)
  Bottom w6: -3617.13,1331.69 -3617.13,1321.85 -3570.87,1275.59 -3570.87,1254.64 -3552.45,1236.22 -3270.13,1236.22 -3258.31,1248.03 ; v1(-2124,1170) -2136,1158 -2136,745.5 -2116.5,726 -1932,726 -1868.24,789.76 U7.50@-1821.46,789.76
RTC_INT: U21.3 | length 3557.8
  Top w6: U21.3@-3601.52,2863.89 -3578.74,2863.89 -3569.6,2873.03 -3212.6,2873.03 -3175.93,2836.36 -3175.93,2758.61 -3143.7,2726.38 -3089.69,2726.38 -3072.4,2709.09 -2648.91,2709.09 v1(-2538,2820) ; -453.15,2567.72 -453.15,2633.85 -450,2637 v1(-450,2658)
  Bottom w6: v1(-2538,2820) -2493,2820 -2448,2775 -1995,2775 -1944,2826 -1533,2826 -1470,2763 -1143,2763 -1107,2727 -645,2727 -609,2763 -534,2763 -450,2679 v1(-450,2658)
SDIO0_CLK/GPIO2_D1: U7.9 | length 2284.2
  Top w6: v1(-1458,2121) -1455,2118 -1455,2121 -1288.84,2121 -1275.29,2134.55 -1191.34,2220.47 -1191.34,2266.54
  Bottom w6: U7.9@-1528.15,386.22 -1589.22,386.22 -1671,468 -1671,1144.5 -1449,1366.5 -1449,2112 v1(-1458,2121)
SDIO0_CMD/GPIO2_D0: U7.11 | length 2105.1
  Top w6: v1(-1374,2097) -1294.06,2097 -1270.33,2120.72 -1171.65,2220.47 -1171.65,2266.54
  Bottom w6: U7.11@-1528.15,405.91 -1480.5,405.91 -1461,425.41 -1461,1186.5 -1365,1282.5 -1365,1656 -1347,1674 -1347,2070 v1(-1374,2097)
SDIO0_D0/SPI5_RXD: U7.13 | length 2546.8
  Top w6: v1(-1518,2433) -1515,2436 -1302,2436 -1220.87,2517.13 -1220.87,2567.72
  Bottom w6: U7.13@-1528.15,425.59 -1492.5,425.59 -1473,445.09 -1473,1198.5 -1377,1294.5 -1377,1665 -1359,1683 -1359,1986 -1398,2025 -1398,2205 -1518,2325 v1(-1518,2433)
SDIO0_D1/SPI5_TXD: U7.15 | length 2552
  Top w6: v1(-1542,2454) -1539,2457 -1509,2457 -1500,2448 -1308,2448 -1240.55,2515.45 -1240.55,2567.72
  Bottom w6: v1(-1542,2454) -1542,2331 -1413,2202 -1413,1896 -1371,1854 -1371,1701 -1389,1683 -1389,1306.5 -1485,1210.5 -1485,453 -1492.72,445.28 U7.15@-1528.15,445.28
SDIO0_D2/SPI5_CLK: U7.17 | length 2745.4
  Top w6: v1(-1593,2430) -1583.65,2439 -1560,2439 -1533,2412 -1506,2412 -1494.65,2423.35 -1296.65,2423.35 -1214.41,2505.59 -1206.59,2505.59 -1201.18,2511 -1201.18,2567.72
  Bottom w6: v1(-1593,2430) -1593,2343 -1437,2187 -1437,1354.5 -1659,1132.5 -1659,484.46 -1639.5,464.96 U7.17@-1528.15,464.96
SDIO0_D3/SPI5_CSN: U7.19 | length 2686.8
  Top w6: v1(-1566,2415) -1551,2400 -1500,2400 -1488,2412 -1290,2412 -1209,2493 -1190.5,2493 -1181.5,2502 -1181.5,2567.72
  Bottom w6: v1(-1566,2415) -1566,2337 -1425,2196 -1425,1347 -1647,1125 -1647,504.15 -1627.5,484.65 U7.19@-1528.15,484.65
SDMMC0_CLK: R77.1 | length 869.5
  Top w6: -1043.7,2567.72 -1043.7,2781.5 -1022.05,2803.15 v1(-1021.65,2803.15)
  Bottom w6: v1(-1021.65,2803.15) -1020.79,2803.15 -1003.94,2820 -840,2820 -819,2841 -693,2841 -660,2874 -660,3033 -618,3075 R77.1@-602.72,3075
SDMMC0_CMD: CN14.3 ED20.1 | length 972.7
  Top w6: -1004.33,2567.72 -1005,2567.72 -1005,2760.75 v1(-970.47,2795.28)
  Bottom w5.91: ED20.1@-555.28,3033 -555.28,3033.3 ED20.1@-555.12,3033.46
  Bottom w6: v1(-970.47,2795.28) -962.2,2787 -837,2787 -801,2823 -666,2823 -642,2847 -642,2994 -630,3006 -566.83,3006 -555.12,3017.72 -555.12,3026 -555.12,3027.5 -555.12,3033.46 -555.12,3039 -555.12,3040.5 -555.12,3055.88 -515,3096 -481.39,3096 CN14.3@-480.93,3096.46
SDMMC0_D0/UART2_RX: CN14.7 ED18.1 | length 1215.1
  Top w5.91: -1102.76,2722.44 -1102.76,2767.72 -1041.73,2828.74 v1(-1039.37,2828.74)
  Top w6: -1102.76,2567.72 -1102.76,2722.44
  Bottom w5.91: ED18.1@-570.28,3288 ED18.1@-563,3288
  Bottom w6: v1(-1039.37,2828.74) -1030.11,2838 -855,2838 -834,2859 -714,2859 -681,2892 -681,3051 -591,3141 -591,3249 -570,3270 -570,3281 -563,3288 -544.69,3269.69 CN14.7@-480.93,3269.68
SDMMC0_D1/UART2_TX: CN14.8 ED17.1 | length 1339.3
  Top w5.91: -1122.44,2759.84 -1122.44,2773.62 -1065.35,2830.71 v1(-1064.96,2830.71)
  Top w6: -1122.44,2567.72 -1122.44,2759.84
  Bottom w6: v1(-1064.96,2830.71) -1045.67,2850 -861,2850 -840,2871 -723,2871 -693,2901 -693,3057 -606,3144 -606,3216 -639,3249 -639,3306 -630,3315 -576.73,3315 -570.28,3321.45 -570.28,3335 -570.28,3336.5 ED17.1@-570.28,3340.55 ; ED17.1@-570.28,3342 ED17.1@-570.28,3340.55 ; CN14.8@-480.93,3312.99 -525.59,3312.99 -553.15,3340.55 ED17.1@-570.28,3340.55
SDMMC0_D2/JTAG_TCK: CN14.1 ED22.1 | length 1079.4
  Top w6: v1(-1146,2811) -1142.13,2807.13 -1142.13,2567.72
  Bottom w5.91: ED22.1@-555.28,2922 -555.28,2923.06 ED22.1@-555.12,2923.23
  Bottom w6: v1(-1146,2811) -1131,2811 -1083,2763 -825,2763 -789.01,2798.99 -677.54,2799.03 -647.97,2799.03 -555.12,2891.88 -555.12,2915 -555.12,2916.5 -555.12,2923.23 -555.12,2925.2 -521.65,2958.66 -521.65,3003.94 -515.75,3009.84 CN14.1@-480.93,3009.84
SDMMC0_D3/JTAG_TMS: CN14.2 ED21.1 | length 1197.8
  Top w6: v1(-1170,2835) -1170,2740.4 -1161.81,2732.21 -1161.81,2567.72
  Bottom w5.91: ED21.1@-555.28,2979 -555.28,2978.51 ED21.1@-555.12,2978.35
  Bottom w6: v1(-1170,2835) -1137,2835 -1077,2775 -831,2775 -795,2811 -654,2811 -624,2841 -624,2937 -612,2949 -562.81,2949 -555.12,2956.69 -555.12,2972 -555.12,2973.5 -555.12,2978.35 -555.12,2980.31 -535.43,3000 -535.43,3045.28 -526.71,3054 -481.78,3054 CN14.2@-480.93,3053.15
SDMMC0_DET_L: CN14.9 ED16.1 | length 1324.4
  Top w5.91: -1024.02,2751.97 -1024.02,2771.26 -970.47,2824.8 v1(-970.47,2870.08)
  Top w6: -1024.02,2567.72 -1024.02,2751.97
  Bottom w6: v1(-970.47,2870.08) -962.39,2862 -867,2862 -843,2886 -732,2886 -705,2913 -705,3063 -621,3147 -621,3210 -654,3243 -654,3360 -645,3369 -580.13,3369 -570.28,3378.84 -570.28,3389 -570.28,3390.5 ED16.1@-570.28,3396 -569.95,3395.67 -557.09,3395.67 -517.72,3356.3 CN14.9@-480.93,3356.3
SLEEP#: U7.20 | length 2886.6
  Top w6: -3317.32,2266.54 -3317.32,2196.64 -3153.15,2032.47 -3153.15,1338.29 -2864.86,1050 v1(-2217,1050)
  Bottom w6: v1(-2217,1050) -2217,693 -2018.49,494.49 U7.20@-1821.46,494.49
SLEEP_L: LED1.2 | length 4697.5
  Top w6: -3396.06,2266.54 -3396.06,2216.29 -3325.83,2146.06 -3318.2,2146.06 -3237.4,2065.26 -3237.4,2032.9 -3177.56,1973.06 -3177.56,1275.58 -2924.81,1022.83 -2008.9,1022.83 -2001.81,1029.92 -1839.35,1029.92 -1780.89,971.46 v1(-1222.44,971.46) ; v1(-795,-168) -795,-186 -794.71,-186 LED1.2@-754.33,-226.38
  Bottom w6: v1(-1222.44,971.46) -1246.06,947.83 -1246.06,883.95 -1232.24,870.13 -1232.24,780.75 -1197.26,745.76 -1197.26,535.91 -1167.12,505.78 -1167.12,266.53 -1153.59,253 -1153.59,212.47 -1147.13,206.01 -1147.13,151.56 -1108.57,113 -1108.57,-47.54 -1073.68,-82.42 -880.58,-82.42 v1(-795,-168)
SMB_ALERT_1V8#: U7.21 | length 3143.9
  Top w6: v1(-1404,1773) -1318.29,1773 -1290.11,1801.18 -988.98,1801.18 -986.02,1804.13 v1(-661.42,1804.13) ; -354.72,2567.72 -354.72,2488.53 -345.47,2479.28 v1(-345.47,2376.97)
  Bottom w5.91: v1(-661.42,1804.13) -661.42,1839 -666.83,1844.41 -666.83,2041.02 -573,2134.84
  Bottom w6: U7.21@-1528.15,504.33 -1615.5,504.33 -1635,523.83 -1635,1119 -1413,1341 -1413,1764 v1(-1404,1773) ; -573,2134.84 -423.81,2284.04 -383.86,2284.04 -342.52,2325.38 -342.52,2374.02 v1(-345.47,2376.97)
SPDIF_TX: CON1.15 | length 3604.3
  Top w6: -2805.51,2266.54 -2805.51,2200.79 -2801.18,2196.46 -2801.18,2143.7 -2822.83,2122.05 -2822.83,1632.26 -2388.78,1198.2 -1556,1198.2 -1542.79,1185 v1(-1257,1185)
  Bottom w6: CON1.15@-1370.47,68.11 -1370.47,126.59 -1329.24,167.82 -1329.24,179.26 -1281.87,226.63 -1281.87,572.23 -1273.6,580.5 -1273.23,580.5 -1251.96,601.77 -1251.96,676.17 -1281.5,705.71 -1281.5,840.53 -1305.12,864.15 -1305.12,1136.88 v1(-1257,1185)
SPI1-CLK: CON1.23 U90052.B1 | length 528.1
  Bottom w5.91: CON1.23@-1770.47,68.11 -1763.58,61.22 -1763.58,45.08 -1742.13,23.62 -1541.34,23.62 -1526.57,38.39 -1526.57,133.27 -1424.8,235.04 U90052.B1@-1424.8,246.46
SPI1-CS0: CON1.24 U90052.A1 | length 549
  Bottom w5.91: CON1.24@-1770.47,-31.89 -1759.84,-21.26 -1759.84,-11.81 -1736.22,11.81 -1532.48,11.81 -1514.76,29.53 -1514.76,117.91 -1450.98,181.69 -1450.98,185.63 -1405.12,231.5 U90052.A1@-1405.12,246.46
SPI1-RXD: CON1.21 U90052.D1 | length 293.1
  Bottom w5.91: CON1.21@-1670.47,68.11 -1670.47,89.37 -1562.99,196.85 -1512.99,196.85 -1464.17,245.67 U90052.D1@-1464.17,246.46
SPI1-TXD: CON1.19 U90052.C1 | length 238.4
  Bottom w5.91: CON1.19@-1570.47,68.11 -1570.47,98.82 -1540.94,128.35 -1540.94,151.18 -1465.75,226.38 -1452.36,226.38 -1444.49,234.25 U90052.C1@-1444.49,246.46
SPI1_CLK: U90052.B3 | length 2427.6
  Top w6: -1437.4,2567.72 -1437.4,2496.4 v1(-1428,2487)
  Bottom w5.91: v1(-1429.13,318.9) -1428.15,318.9 -1424.8,315.55 U90052.B3@-1424.8,285.83
  Bottom w6: v1(-1429.13,318.9) -1429.13,321.21 -1420.28,327.12 -1420.28,397.08 -1424.91,401.71 -1424.91,1150.59 -1329,1246.5 -1329,1626 -1305.09,1649.91 -1305.09,2094.09 -1359,2148 -1359,2220 -1466.91,2327.91 -1466.91,2448.09 v1(-1428,2487)
SPI1_CS0: U90052.A3 | length 2448.3
  Top w6: -1398.03,2567.72 -1398.03,2490.03 v1(-1395,2487)
  Bottom w5.91: -1411.42,456 -1411.42,407.48 -1384.84,380.91 -1384.84,306.1 U90052.A3@-1405.12,285.83
  Bottom w6: -1411.42,456 -1413,456 -1413,1138.5 -1317,1234.5 -1317,1620 -1290,1647 -1290,2097 -1347,2154 -1347,2226 -1455,2334 -1455,2427 v1(-1395,2487)
SPI1_RXD: U90052.D3 | length 2472.4
  Top w6: v1(-1479.33,339.57) -1479.33,343 -1432,343 v1(-1437,342) ; v1(-1461,2484) -1461,2513.09 -1457.09,2517 -1457.09,2567.72
  Bottom w5.91: v1(-1479.33,339.57) -1479.33,336.61 -1485.24,330.71 -1485.24,316.44 -1464.76,295.96 -1464.76,286.42 U90052.D3@-1464.17,285.83
  Bottom w6: v1(-1461,2484) -1479,2466 -1479,2322 -1371,2214 -1371,2142 -1317,2088 -1317,1656 -1341,1632 -1341,1258.5 -1437,1162.5 v1(-1437,342)
SPI1_TXD: U90052.C3 | length 2420.2
  Top w6: v1(-1491,2493) -1476.77,2507.23 -1476.77,2567.72
  Bottom w5.91: -1464.57,321.85 -1463.88,322.54 ; -1464.57,323.23 -1463.88,322.54 ; -1455.95,354.64 -1455.95,330.47 -1463.88,322.54 ; U90052.C3@-1444.49,285.83 -1444.49,303.15 -1463.88,322.54
  Bottom w6: v1(-1491,2493) -1491,2316 -1383,2208 -1383,2136 -1332,2085 -1332,1662 -1353,1641 -1353,1270.5 -1449,1174.5 -1449,360 -1455.95,354.64 ; -1464.57,321.85 -1464.57,323.23
TR0: J4.11 J5.2 | length 7258.5
  Top w6: v1@-3508.26,2464.26 v1(-3507,2463)
  Top w12: v1(-3573,1149) -3501.2,1149 -3364.39,1285.81 -3364.39,1318.6 -3323.33,1359.66 -3323.33,1776.52 -3318.9,1780.95 -3318.9,1812.5 -3340.38,1833.98 -3340.38,1858.85 -3572.83,2091.31 -3572.83,2429.25 -3537.82,2464.26 v1@-3508.26,2464.26
  Bottom w12: v1(-3573,1149) -3606,1116 -3606,549 -3576,519 -3576,423 -3498,345 -3049.68,345 -3028.68,324 -3028.68,282 -3012,265.32 -3012,201 -2988,177 -2909.61,177 J5.2@-2859.06,227.56 ; v1(-3507,2463) -3507,2484 -3378,2613 -3291,2613 -3273,2631 -3273,3192 -3213,3252 -2973,3252 -2922,3201 -2868,3201 -2817,3252 -2400,3252 -2343,3195 -2289,3195 -2088,2994 -1449,2994 -1395,3048 -1395,3285 -1275,3405 -1002,3405 -804,3207 -804,3189 -764.17,3149.17 J4.11@-764.17,3143.7
TR1: J4.12 J5.1 | length 6949.6
  Top w12: v1(-3561,1116) -3422.5,1116 -3273.84,1264.65 -3273.84,1341.17 -3280.03,1347.36 -3280.03,1799.55 -3322.31,1841.83 -3322.31,1870.25 -3445.82,1993.77 -3445.82,2043.19 -3552.17,2149.54 -3552.17,2350.47 -3477,2425.63 v1(-3477,2460)
  Bottom w12: v1(-3561,1116) -3588,1089 -3588,1020 -3582,1014 -3582,555 -3555,528 -3555,429 -3492,366 -3033.37,366 -3009.19,341.81 -3009.19,294 -2955.19,240 -2955.19,231.43 J5.1@-2959.06,227.56 ; v1(-3477,2460) -3477,2484 -3369,2592 -3285,2592 -3255,2622 -3255,3183 -3207,3231 -2979,3231 -2931,3183 -2856,3183 -2805,3234 -2409,3234 -2349,3174 -2298,3174 -2100,2976 -1437,2976 -1374,3039 -1374,3273 -1266,3381 -1014,3381 -864.17,3231.17 J4.12@-864.17,3193.7
TR2: J4.13 J5.4 | length 6338.8
  Top w12: v1(-3564,1059) -3428.85,1059 -3236.03,1251.82 -3236.03,1421.22 -3239.17,1424.36 -3239.17,1892.75 -3512.89,2166.47 -3512.89,2324.91 -3417,2420.81 v1(-3417,2463)
  Bottom w12: v1(-3564,1059) -3564,1044 -3561,1044 -3561,571.74 -3520.78,531.52 -3520.78,517.97 -3386.81,384 -2915.5,384 J5.4@-2859.06,327.56 ; v1(-3417,2463) -3417,2464.57 -3412.2,2464.57 -3326.77,2550 -3267,2550 -3219,2598 -3219,3165 -3189,3195 -3000,3195 -2952,3147 -2835,3147 -2784,3198 -2427,3198 -2361,3132 -2316,3132 -2124,2940 -1575,2940 -1524,2889 -1458,2889 -1251,3096 -1161,3096 -1114.17,3142.83 J4.13@-1114.17,3193.7
TR3: J4.14 J5.3 | length 6456.6
  Top w12: v1(-3549,1086) -3427.18,1086 -3253.94,1259.24 -3253.94,1386.27 -3259.84,1392.18 -3259.84,1885.3 -3531.5,2156.95 -3531.5,2338.72 -3447,2423.22 v1(-3447,2460)
  Bottom w12: v1(-3549,1086) -3540,1078.22 -3540,587.6 -3537.05,587.6 -3506.4,556.95 -3506.4,547.74 -3504.92,546.26 -3504.92,543.31 -3371.16,409.55 -3334.55,409.55 -3330,405 -2841,405 -2805,369 -2805,303 -2829,279 -2910.5,279 J5.3@-2959.06,327.56 ; v1(-3447,2460) -3447,2484 -3360,2571 -3276,2571 -3237,2610 -3237,3174 -3198,3213 -2988,3213 -2940,3165 -2844,3165 -2793,3216 -2418,3216 -2355,3153 -2307,3153 -2112,2958 -1563,2958 -1515,2910 -1467,2910 -1233.3,3143.7 J4.14@-1214.17,3143.7
TYPEC0_DM: FB2.1 | length 2907.3
  Top w5.91: FB2.1@-3108.28,563.43 -3108.28,576 -3121.06,588.78 -3121.06,672.17 -2987.13,806.1 -2092.89,806.1 v1(-2075.79,789) ; -1683.46,2266.54 -1683.46,2220.87 -1680.12,2217.52 -1680.12,2152.56 -1662.4,2134.84 -1656.5,2134.84 v1(-1641.73,2120.08)
  Bottom w5.91: v1(-2075.79,789) -2075.79,1266.73 -1632.87,1709.65 -1632.87,2111.22 v1(-1641.73,2120.08)
TYPEC0_DP: FB2.4 | length 2930.9
  Top w5.91: FB2.4@-3143.72,563.43 -3143.72,576 -3132.87,586.85 -3132.87,677.06 -2992.02,817.91 -2990.27,817.91 -2072.83,817.91 -2066.93,812.01 -2055.99,812.01 v1(-2055,813) ; -1663.78,2266.54 -1663.78,2220.47 -1664.81,2219.44 -1664.81,2218.06 -1668.31,2214.57 -1668.31,2158.46 -1656.5,2146.65 -1644.69,2146.65 -1638.78,2140.75 v1(-1632.87,2140.75)
  Bottom w5.91: v1(-2055,813) -2063.98,821.98 -2063.98,1261.84 -1621.06,1704.75 -1621.06,1709.65 -1621.06,2130.97 -1630.84,2140.75 v1(-1632.87,2140.75)
TYPEC0_ID: R54.1 | length 3675.1
  Top w6: v1(-2739,18) v1(-2649,18) ; v1(-1703.74,2471.46) -1702.75,2473.04 -1693.28,2467.14 -1691.69,2465.55 -1646.8,2465.55 -1594.88,2517.47 -1594.88,2567.72
  Bottom w6: R54.1@-3252.28,18 -3114.56,18 -3103.04,29.53 -2865.05,29.53 -2853.52,18 v1(-2739,18) ; v1(-2649,18) -2649,333.93 -2572.82,410.12 -2572.82,1073.68 -2475.96,1170.54 -2475.96,1342.03 -2056.4,1761.59 -2006.07,1761.59 -1822.51,1945.14 -1822.51,1971.8 -1775.73,2018.58 -1775.73,2406.14 -1742.85,2439.02 -1736.17,2439.02 v1(-1703.74,2471.46)
TYPEC0_RX1N: U8.1 U8.10 USB1.5 | length 3452.7
  Top w5.91: USB1.5@-3165.75,256.3 -3165.75,297.94 -3183.75,315.94 -3287.91,315.94 -3296.63,324.66 U8.10@-3296.63,336.78 U8.1@-3296.63,371.22 -3296.63,392.95 -3300,396.32 -3300,417.81 -3174.19,543.62 -3174.19,545.1 -3174,545.29 -3174,692.15 -2995.08,871.06 -2020.06,871.06 v1(-2010,861) ; -1624.41,2266.54 -1621.06,2266.54 -1621.06,2170.97 -1587,2136.9 v1(-1587,2124)
  Bottom w5.91: v1(-2010,861) -2010,889.3 -2010.83,890.12 -2010.83,1232.22 -1579.72,1663.32 -1579.72,2117.61 -1585.63,2123.52 -1585.63,2124 v1(-1587,2124)
TYPEC0_RX1P: U8.2 U8.9 USB1.6 | length 3439.8
  Top w5.91: USB1.6@-3244.49,256.3 -3244.49,280.51 -3236.22,288.78 -3236.22,301.18 -3239.17,304.13 -3304.32,304.13 -3316.32,316.13 U8.9@-3316.32,336.78 U8.2@-3316.32,371.22 -3316.32,390.14 -3312.27,394.19 -3312.27,422.24 -3186,548.51 -3186,696.85 -2999.98,882.87 -1999.02,882.87 -1999.02,882 v1(-1986,882) ; -1604.72,2266.54 -1609.25,2266.54 -1609.25,2176.18 -1567.91,2134.84 -1567.91,2128.94 v1(-1564.96,2125.98)
  Bottom w5.91: v1(-1986,882) -1999.02,895.02 -1999.02,1227.33 -1567.91,1658.43 -1567.91,2123.03 v1(-1564.96,2125.98)
TYPEC0_TX1N: C44.1 | length 3254.6
  Top w5.91: C44.1@-3360,449.72 -3333.66,449.72 -3215.55,567.83 -3215.55,738.19 -3023.62,930.12 -1961.61,930.12 v1(-1945.87,918.31) ; -1565.35,2266.54 -1565.35,2220.47 -1562.01,2217.13 -1562.01,2183.1 -1550.2,2171.29 v1(-1550.2,2158.46)
  Bottom w5.91: v1(-1945.87,918.31) -1957.68,930.12 -1957.68,945.99 -1952.88,950.79 -1951.77,953.74 -1951.77,1107.28 -1951.77,1109.22 -1538.39,1522.61 -1538.39,2146.65 v1(-1550.2,2158.46)
TYPEC0_TX1NJ: C44.2 U8.4 U8.7 USB1.8 | length 216.8
  Top w6: USB1.8@-3401.97,256.3 -3411,265.33 -3411,291 -3414,294 -3414,303 -3411,306 -3367.69,306 -3355.69,318 U8.7@-3355.69,336.78 U8.4@-3355.69,371.22 -3355.69,414.28 C44.2@-3360,414.28
TYPEC0_TX1P: C43.1 | length 3277.2
  Top w5.91: C43.1@-3396,449.72 -3370.32,475.39 -3324.8,475.39 -3227.36,572.83 -3227.36,741.14 -3227.36,743.08 -3028.51,941.93 -3026.58,941.93 -1951.77,941.93 -1951.77,938.98 v1(-1937.01,938.98) ; -1545.67,2266.54 -1545.67,2224.17 -1550.2,2219.65 -1550.2,2187.99 v1(-1529.53,2167.32)
  Bottom w5.91: v1(-1937.01,938.98) -1939.96,941.93 -1939.96,1104.33 -1526.57,1517.72 -1526.57,2161.38 -1529.53,2164.33 v1(-1529.53,2167.32)
TYPEC0_TX1PJ: C43.2 U8.5 U8.6 USB1.9 | length 246.2
  Top w6: USB1.9@-3480.71,256.3 -3471,266.01 -3471,291 -3444,318 -3385.18,318 -3375.37,327.81 U8.6@-3375.37,336.78 U8.5@-3375.37,371.22 -3375.37,390 -3393.37,408 -3393.37,414.28 C43.2@-3396,414.28
TYPEC0_U2VBUSDET: C48.1 R52.2 R53.1 | length 4399.5
  Top w5.91: -1139.76,2009.06 -1139.76,2013.78 -1138.63,2014.91 -1138.63,2016.39 -1053.05,2101.97 -1053.05,2266.04 -1053.54,2266.54
  Top w6: R52.2@-3516,446.72 C48.1@-3480,446.72 R53.1@-3444,446.72 -3444,478.53 -3496.52,531.04 -3496.52,532.61 -3504.14,540.23 -3504.14,590.55 -3516.73,603.14 -3516.73,611.38 -3510.25,617.87 -3510.25,753.94 -3456.69,807.49 -3337.52,807.49 -3172.25,972.76 -1923.02,972.76 -1903.05,952.79 -1903.05,950.6 -1891.45,939 -1486.5,939 -1483.52,936.02 -1122.05,936.02 -1092.07,966 v1(-1068,966) ; v1(-1142.72,1984.25) -1139.76,1984.25 -1139.76,2009.06
  Bottom w6: v1(-1142.72,1984.25) -1091.15,1984.25 -1038,1931.1 -1038,1533 -1068,1503 v1(-1068,966)
TYPEC-IN: C8.1 C9.1 J2.29 J2.30 R8.2 | length 725.7
  Bottom w6: C9.1@-258.28,252 C9.1@-252,252 ; R8.2@-252,297 -251,298 R8.2@-251,306
  Bottom w39.37: -126,166.54 -50.2,242.34 -50.2,456.25 -28.91,477.54 -11.81,494.64 ; J2.29@-46,494.64 -11.81,494.64 ; J2.30@32.74,494.64 -11.81,494.64
  Bottom w40: R8.2@-252,297 -252,252 -252,186 C8.1@-238.6,180
  Bottom w50: C8.1@-238.6,180 -241.46,186 -237.03,181.57 -222,166.54 -126,166.54
TYPEC-IN12V: C90287.2 J18.A4 J18.A9 J18.B4 J18.B9 R102.2 R122.2 U90057.1 U90059.2 | length 6015.8
  Top w5.91: R122.2@-3516.28,3349 -3469.28,3396 v1(-3429,3396)
  Top w6: v1@-3411,3396 v1(-3405,3396)
  Top w7.87: U90059.2@-3281.5,3047.24 C90287.2@-3238.19,3047.24 C90287.2@-3236.22,3047.24
  Top w19.68: C90287.2@-3238.19,3047.24 -3238.19,3129.92 -3161.42,3206.69 -3161.42,3378.22 v1@-3179.2,3396
  Top w20: v1(-3429,3396) v1@-3411,3396 ; J18.A9@-3405.12,3444.09 -3405,3443.98 v1(-3405,3396) ; v1@-3204.14,3396 v1(-3204,3396) -3179.2,3396 v1(-3174,3396) -3053.06,3396 R102.2@-3030,3347.06
  Top w23: J18.B9@-3216.14,3444.09 -3216.14,3408 v1@-3204.14,3396
  vcc w39.37: -3831.3,868.11 -3831.3,624.16 -3809.5,602.36 ; -3831.3,956.69 -3831.3,1081.38 -3809.45,1103.24 -3809.45,1349.41 -3821.26,1361.22 -3821.26,1747.64 -3814.96,1753.94 -3814.96,2583.66 -3797.24,2601.38 -3797.24,2626.71 -3794.21,2629.74 -3794.21,2676.87 -3838,2720.66 -3838,2915.85 -3776.56,2977.29 -3776.56,3229.49 -3648.68,3357.36 -3522.72,3357.36 -3487.2,3321.85 -3437.01,3321.85 -3437.01,3324.8 -3416.34,3345.47 -3416.34,3383.86 -3259.84,3383.86 -3252.5,3376.51 -3193.49,3376.51 v1(-3174,3396) ; U90057.1@-2875.98,-156.5 U90057.1@-2864.17,-156.5
  vcc w47.24: -3831.3,868.11 -3831.3,956.69
  vcc w59.06: -3809.5,602.36 -3795.58,602.36 -3752.95,559.73 -3752.95,428.52 -3723.43,398.99 -3723.43,376.22 -3631.89,284.68 -3631.89,106.3 -3525.59,0 -3299.21,0 -3142.72,-156.5 U90057.1@-2875.98,-156.5
  Bottom w20: v1(-3429,3396) v1(-3405,3396) v1(-3204,3396) v1(-3174,3396)
TYPEC_D: C115.1 R121.2 R122.1 | length 1430.5
  Top w5.91: R121.2@-3592.28,3349 -3566.93,3349 ; R122.1@-3551.72,3349 -3566.93,3349 ; C115.1@-3090.55,2763.78 -3090.55,2766.16 C115.1@-3085.69,2771.02 ; v1(-3044.29,2737.2) -3064.96,2757.87 -3072.54,2757.87 -3084.5,2769.83 C115.1@-3085.69,2771.02 ; -2874.41,2567.72 -2874.41,2626.57 v1(-2873.03,2627.95) ; -3566.93,3349 v1(-3566.93,3324.8) -3537.32,3324.8 -3504.92,3292.4 -3504.92,2958.66 -3460.63,2914.37 -3208.66,2914.37 -3186.02,2891.73 -3123.74,2891.73 -3104.06,2872.05 -3104.06,2829.01 -3088.58,2813.54 -3088.58,2773.91 C115.1@-3085.69,2771.02
  Bottom w5.91: v1(-3044.29,2737.2) -3044.29,2706.7 -3066.02,2684.97 -3066.02,2671.59 -3040.1,2645.67 -2976.38,2645.67 -2964.57,2633.86 -2892.01,2633.86 -2886.11,2627.95 v1(-2873.03,2627.95)
TYPEC_IN: C104.1 D3.1 R8.1 R102.1 R103.2 U19.3 U22.1 | length 7129.9
  Top w5.91: D3.1@-3126.58,2980.31 D3.1@-3145.67,2980.31 -3092.52,3033.5 ; C104.1@-3092.52,3072.83 -3091.02,3072.83 -3044.74,3119.12 -3030,3133.86
  Top w6: D3.1@-3126.58,2980.31 -3126.58,2989.1 -3094.6,3021.09 -3080.48,3035.2 -3066,3049.68 U22.1@-3009.65,3049.68
  Top w20: -3048,3113.72 -3044.74,3119.12 -3034.6,3135.91 R103.2@-3030,3143.53 ; v1(-3048,3144) -3038.46,3153.54 R103.2@-3030,3153.54 ; R102.1@-3030,3225.01 R103.2@-3030,3153.54 ; R103.2@-3030,3143.53 R103.2@-3030,3153.54 ; R103.2@-3030,3143.53 R103.2@-3029.72,3144 -3030,3132.28 -3030,3133.86 R103.2@-3030,3143.53
  Top w30: U19.3@-3732.56,2982 v1(-3693,2982) v1(-3693,2949)
  vcc w30: v1(-3693,2949) v1(-3693,2982) -3634.14,2982 -3425.2,3190.94 -3073.94,3190.94 v1(-3051,3168)
  vcc w60: v1(-3051,3168) v1(-3024,3168) -2778,3168 -2715,3231 -2424,3231 -2343,3150 -2289,3150 -2112,2973 -1596,2973 -1575,2994 -1353,2994 -1260,2901 -1260,2757 -1299,2718 -1299,2650.5 -1237.5,2589 -807,2589 -792,2574 -431.1,2574 -428.33,2576.77 -307.58,2576.77 -219,2488.19 -219,2403.4 -244.02,2378.38 -244.02,2371.98 -277.56,2338.44 -277.56,2201.81 -315,2164.37 -315,1868.81 -357,1826.81 -357,868.11 -352.11,868.11 -264,780 -264,483 -339,408 v1(-339,339)
  Bottom w6: v1(-360,324) -360,312 v1(-339,312) -339,306 R8.1@-313,306
  Bottom w30: v1(-339,339) v1(-312,339) -312,307 R8.1@-313,306
  other v1: -3072,3144
UART0_CTS: U7.34 | length 3579.8
  Top w6: -3012.2,2567.72 -3012.2,2502.2 -2898,2388 -2883,2388 v1(-2844,2349) ; v1(-1975.39,2022.64) -1991.75,2022.64 -2018.33,2049.21 -2110.79,2049.21 -2168.21,1991.79 -2168.21,1815.64 -2093.52,1740.94 -2084.07,1740.94 -1960.63,1617.5 v1(-1960.63,1562.01)
  Bottom w5.91: v1(-1975.39,2022.64) -1937.01,2061.02 -1937.01,2152.17 -1919.29,2169.88 -1919.29,2220.12 -1952.72,2253.54 -1952.72,2267.72
  Bottom w6: v1(-2844,2349) -2830.29,2349 -2817.72,2336.43 -2021.43,2336.43 -1952.72,2267.72 ; v1(-1960.63,1562.01) -2034.45,1488.19 -2077.26,1488.19 -2164.37,1401.08 -2164.37,727.08 -2069.57,632.28 U7.34@-1821.46,632.28
UART0_RTS: U7.36 | length 3580.5
  Top w6: -2992.52,2567.72 -2992.52,2500.52 -2892,2400 -2856,2400 v1(-2814,2358) ; v1(-2010.83,2013.78) -2035.24,2038.19 -2106.26,2038.19 -2157.21,1987.24 -2157.21,1820.2 -2107.88,1770.87 -2092.72,1770.87 v1(-1901.57,1579.72)
  Bottom w5.91: v1(-2010.83,2013.78) -1994.46,2013.78 -1985.6,2004.92 -1970.73,2004.92 -1925.2,2050.45 -1925.2,2145.83 -1907.48,2163.54 -1907.48,2230.05 -1939.96,2262.53 -1939.96,2275.96
  Bottom w6: v1(-2814,2358) -2759.59,2358 -2749.93,2348.34 -2012.34,2348.34 -1939.96,2275.96 ; v1(-1901.57,1579.72) -2149.61,1331.69 -2149.61,729.16 -2072.42,651.97 U7.36@-1821.46,651.97
UART0_RXD: U7.22 | length 3656
  Top w6: -2972.83,2567.72 -2972.83,2517.47 -2888.38,2433.02 -2856.5,2433.02 -2745.29,2321.81 -1870.14,2321.81 -1862.71,2314.38 -1862.71,2211.72 -1758.88,2107.88 -1729.63,2107.88 -1700.49,2078.74 v1(-1665.35,2078.74)
  Bottom w6: U7.22@-1821.46,514.17 -1989.81,514.17 -2193.9,718.26 -2193.9,1405.23 -2076.23,1522.89 -2042.12,1522.89 -1922.1,1642.91 -1922.1,1655.12 -1706.62,1870.61 -1706.62,1962.57 -1669.74,1999.45 -1669.74,2060.95 -1665.35,2065.33 v1(-1665.35,2078.74)
UART0_TXD: U7.32 | length 3597
  Top w6: -2953.15,2567.72 -2953.15,2517.47 -2882.62,2446.94 -2843.51,2446.94 -2730.32,2333.75 -1865.25,2333.75 -1848.1,2316.6 -1848.1,2213.94 -1767.21,2133.05 -1727.63,2133.05 -1689.2,2094.61 -1658.78,2094.61 -1649.48,2085.32 -1649.48,2069.63 -1653.54,2065.57 v1(-1653.54,2052.17)
  Bottom w6: U7.32@-1821.46,612.6 -2066.72,612.6 -2179.13,725.01 -2179.13,1403.15 -2076.38,1505.91 -2042.27,1505.91 -1907.48,1640.69 -1907.48,1652.44 -1683.07,1876.85 -1683.07,1963.33 -1653.54,1992.86 v1(-1653.54,2052.17)
UART2-RX: CON1.10 U90055.D1 | length 721.2
  Bottom w5.91: U90055.D1@-1163.39,593.5 -1178.15,578.74 -1178.15,536.11 -1154.78,512.74 -1154.78,274.94 -1140.31,260.46 -1140.31,215.96 -1135.27,210.92 -1135.27,163.2 -1078.87,106.8 -1055.49,106.8 -1032.52,83.83 -1032.52,6.06 CON1.10@-1070.47,-31.89
UART2-TX: CON1.8 U90055.C1 | length 781.3
  Bottom w5.91: U90055.C1@-1143.7,593.5 -1143.7,551.29 -1129.86,537.45 -1129.86,289.38 -1116.28,275.8 -1116.28,225.37 -1111.6,220.69 -1111.6,172.94 -1071.2,132.54 -981.23,132.54 -932.52,83.83 -932.52,6.06 CON1.8@-970.47,-31.89
UART2_RX: U90055.D3 | length 4160.5
  Top w5.91: -3071.26,2567.72 -3071.26,2498.17 -2917.57,2344.49 v1(-2893.7,2344.49) ; v1(-2164.37,2043.31) -2164.37,2021.8 -2179.17,2007.01 -2179.17,1811.1 -2051.13,1683.07 -2041.69,1683.07 -1980.71,1622.09 -1980.71,1559.7 -1967.07,1546.06 -1908.92,1546.06 -1826.24,1628.74 -1632.83,1628.74 -1589.91,1585.83 -1180.91,1585.83 v1(-1163.39,1603.35)
  Bottom w5.91: v1(-2893.7,2344.49) -2861.98,2312.76 -2050.38,2312.76 -1943.17,2205.56 -1943.17,2187.74 -1960.63,2170.28 -1960.63,2074.07 -1976.63,2058.07 -1981.61,2058.07 -1996.37,2043.31 v1(-2164.37,2043.31) ; U90055.D3@-1163.39,632.87 -1184.46,653.95 -1184.46,760.42 -1219.49,795.44 -1219.49,875.09 -1231.3,886.9 -1231.3,928.87 -1201.77,958.39 -1201.77,1016.94 -1169.29,1049.42 -1169.29,1585.5 -1163.39,1591.41 v1(-1163.39,1603.35)
UART2_TX: U90055.C3 | length 4211.8
  Top w5.91: -3051.57,2567.72 -3051.57,2495.19 -2924.49,2368.11 v1(-2893.7,2368.11) ; v1(-2214.57,1987.2) -2214.57,1821.45 -2030.36,1637.24 -2030.36,1592.65 -1972.08,1534.37 -1902.55,1534.37 -1819.1,1617.83 -1673.04,1617.83 -1629.58,1574.36 -1159.04,1574.36 -1150.73,1582.68 v1(-1148.62,1582.68)
  Bottom w5.91: v1(-2893.7,2368.11) -2850.17,2324.57 -2045.49,2324.57 -1931.1,2210.19 -1931.1,2178.4 -1948.82,2160.68 -1948.82,2069.18 -1974.69,2043.31 -1978.74,2043.31 -1990.55,2031.5 -2029,2031.5 -2073.3,1987.2 v1(-2214.57,1987.2) ; v1(-1148.62,1582.68) -1148.62,1029.56 -1187.01,991.18 -1187.01,945.1 -1219.49,912.62 -1219.49,892.74 -1207.68,880.92 -1207.68,811.02 -1160.43,763.77 -1160.43,750.15 -1132.29,722.01 -1132.29,644.28 U90055.C3@-1143.7,632.87
USB0_EN_OC#: U9.4 | length 3817.2
  Top w5.91: U9.4@-3685.12,577.4 -3675.28,577.4 -3655.51,597.17 -3655.51,615.85 -3584.65,686.71 -3584.65,986.17 -3539.07,1031.75 -3427.42,1031.75 -3251.5,1207.68 v1(-3227.36,1207.68) ; v1(-2917.32,1242.13) -2771.65,1242.13 v1(-2719.49,1189.96) ; v1(-2391.73,1872.05) -2331.5,1811.81 v1(-2331.5,1779.13)
  Top w6: v1(-1875,2486.22) -1857.57,2486.22 -1856.46,2487.33 -1747.67,2487.33 -1715.55,2455.22 -1699.25,2455.22 -1697.68,2453.65 -1619.34,2453.65 -1555.51,2517.47 -1555.51,2567.72
  Bottom w5.91: v1(-3227.36,1207.68) -3216.54,1207.68 -3215.55,1206.69 -3064.36,1206.69 -3034.83,1236.22 -2926.73,1236.22 v1(-2917.32,1242.13) ; v1(-2719.49,1189.96) -2719.49,1391.14 v1(-2331.5,1779.13) ; v1(-2391.73,1872.05) -2384.08,1872.05 -2379.92,1876.2
  Bottom w6: -2379.92,1876.2 -2376.99,1879.13 -2123.52,1879.13 -2115.64,1871.26 -2092.75,1871.26 -2074.25,1852.76 -2033.37,1852.76 -1931.5,1954.63 -1931.5,1981.49 -1853.15,2059.83 -1853.15,2275.9 -1875.59,2298.34 -1875.59,2459.2 -1875,2459.79 v1(-1875,2486.22)
USB1_EN_OC#: U10.4 | length 1038.9
  Top w6: v1(-1929,2802) -1929,2688.28 -1839.57,2598.85 -1839.57,2550.1 -1796.35,2506.89 -1708.78,2506.89 -1682.2,2480.31 -1670.24,2480.31 -1653.94,2496.61 -1653.94,2567.72 ; v1(-1548,2763) -1546.6,2761.6 U10.4@-1513.88,2761.6
  Bottom w6: v1(-1929,2802) -1917,2814 -1572,2814 -1560,2802 -1560,2775 v1(-1548,2763)
VBUS_TYPEC: C45.1 C46.1 R52.1 U9.1 USB1.1 | length 549
  Top w6: U9.1@-3574.88,502.6 -3574.88,489.28 -3574.6,489
  Top w12: C46.1@-3574.6,432 -3553.88,411.28 R52.1@-3516,411.28
  Top w20: C45.1@-3580.5,360 -3531,360 -3516,345 -3516,213 -3501,198 -3450.34,198 -3441.34,207 USB1.1@-3441.34,256.3
  Top w30: C45.1@-3580.5,360 -3580.5,426.09 C46.1@-3574.6,432 -3574.6,489